# Altium PCB PCB1.PcbDoc
Units mm, origin at the board's own origin, x right, y up, seen from the top; angles counter-clockwise.
Board outline 56.13 x 52.96 mm, 2 copper layers (Top Layer, Bottom Layer); 22 components, 19 nets, 89 pads, 0 vias.
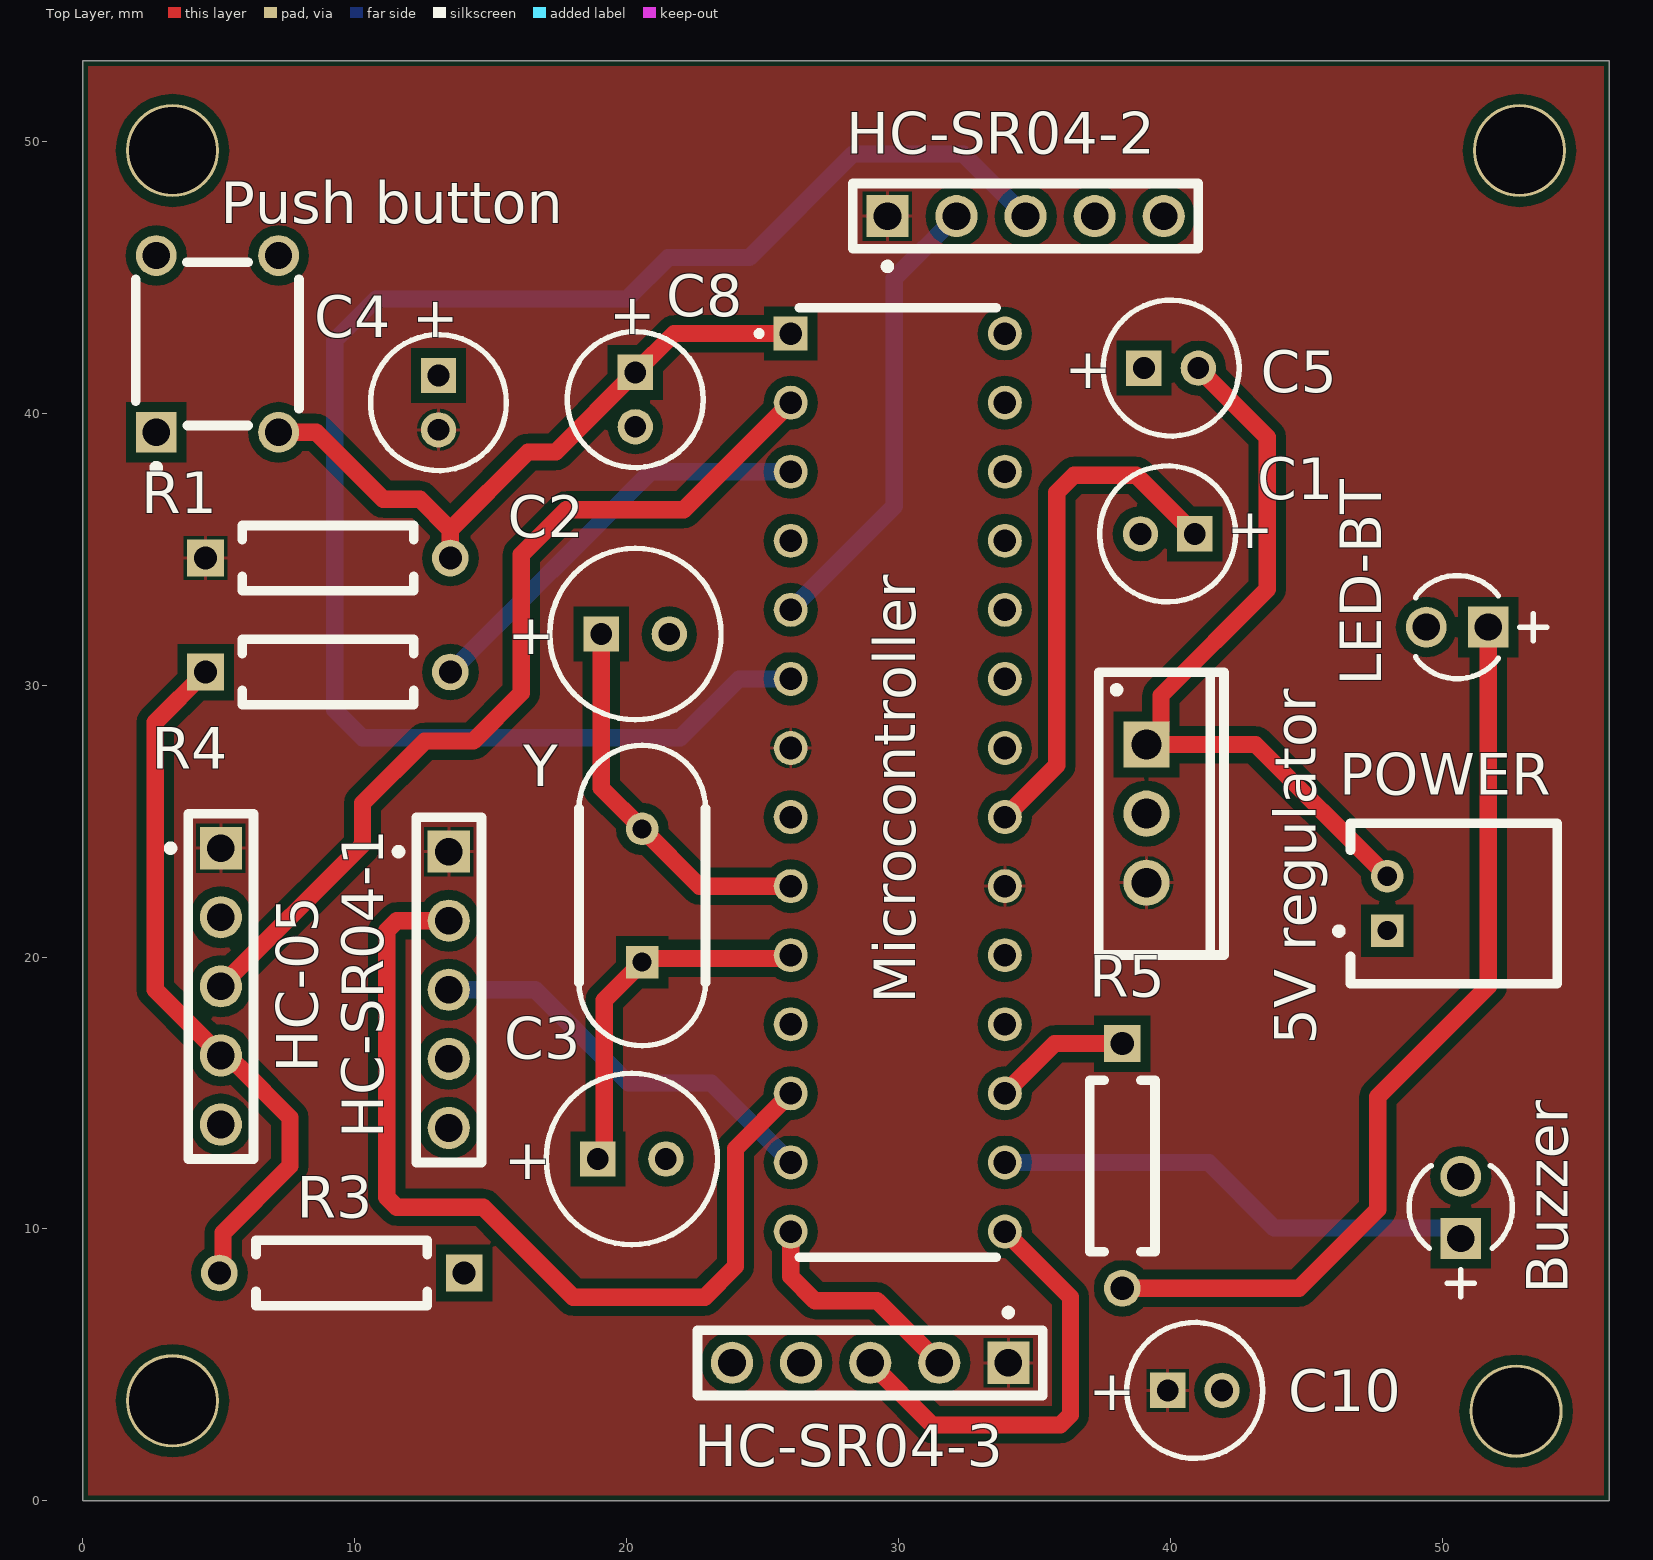
[diagram p0: Top Layer view]
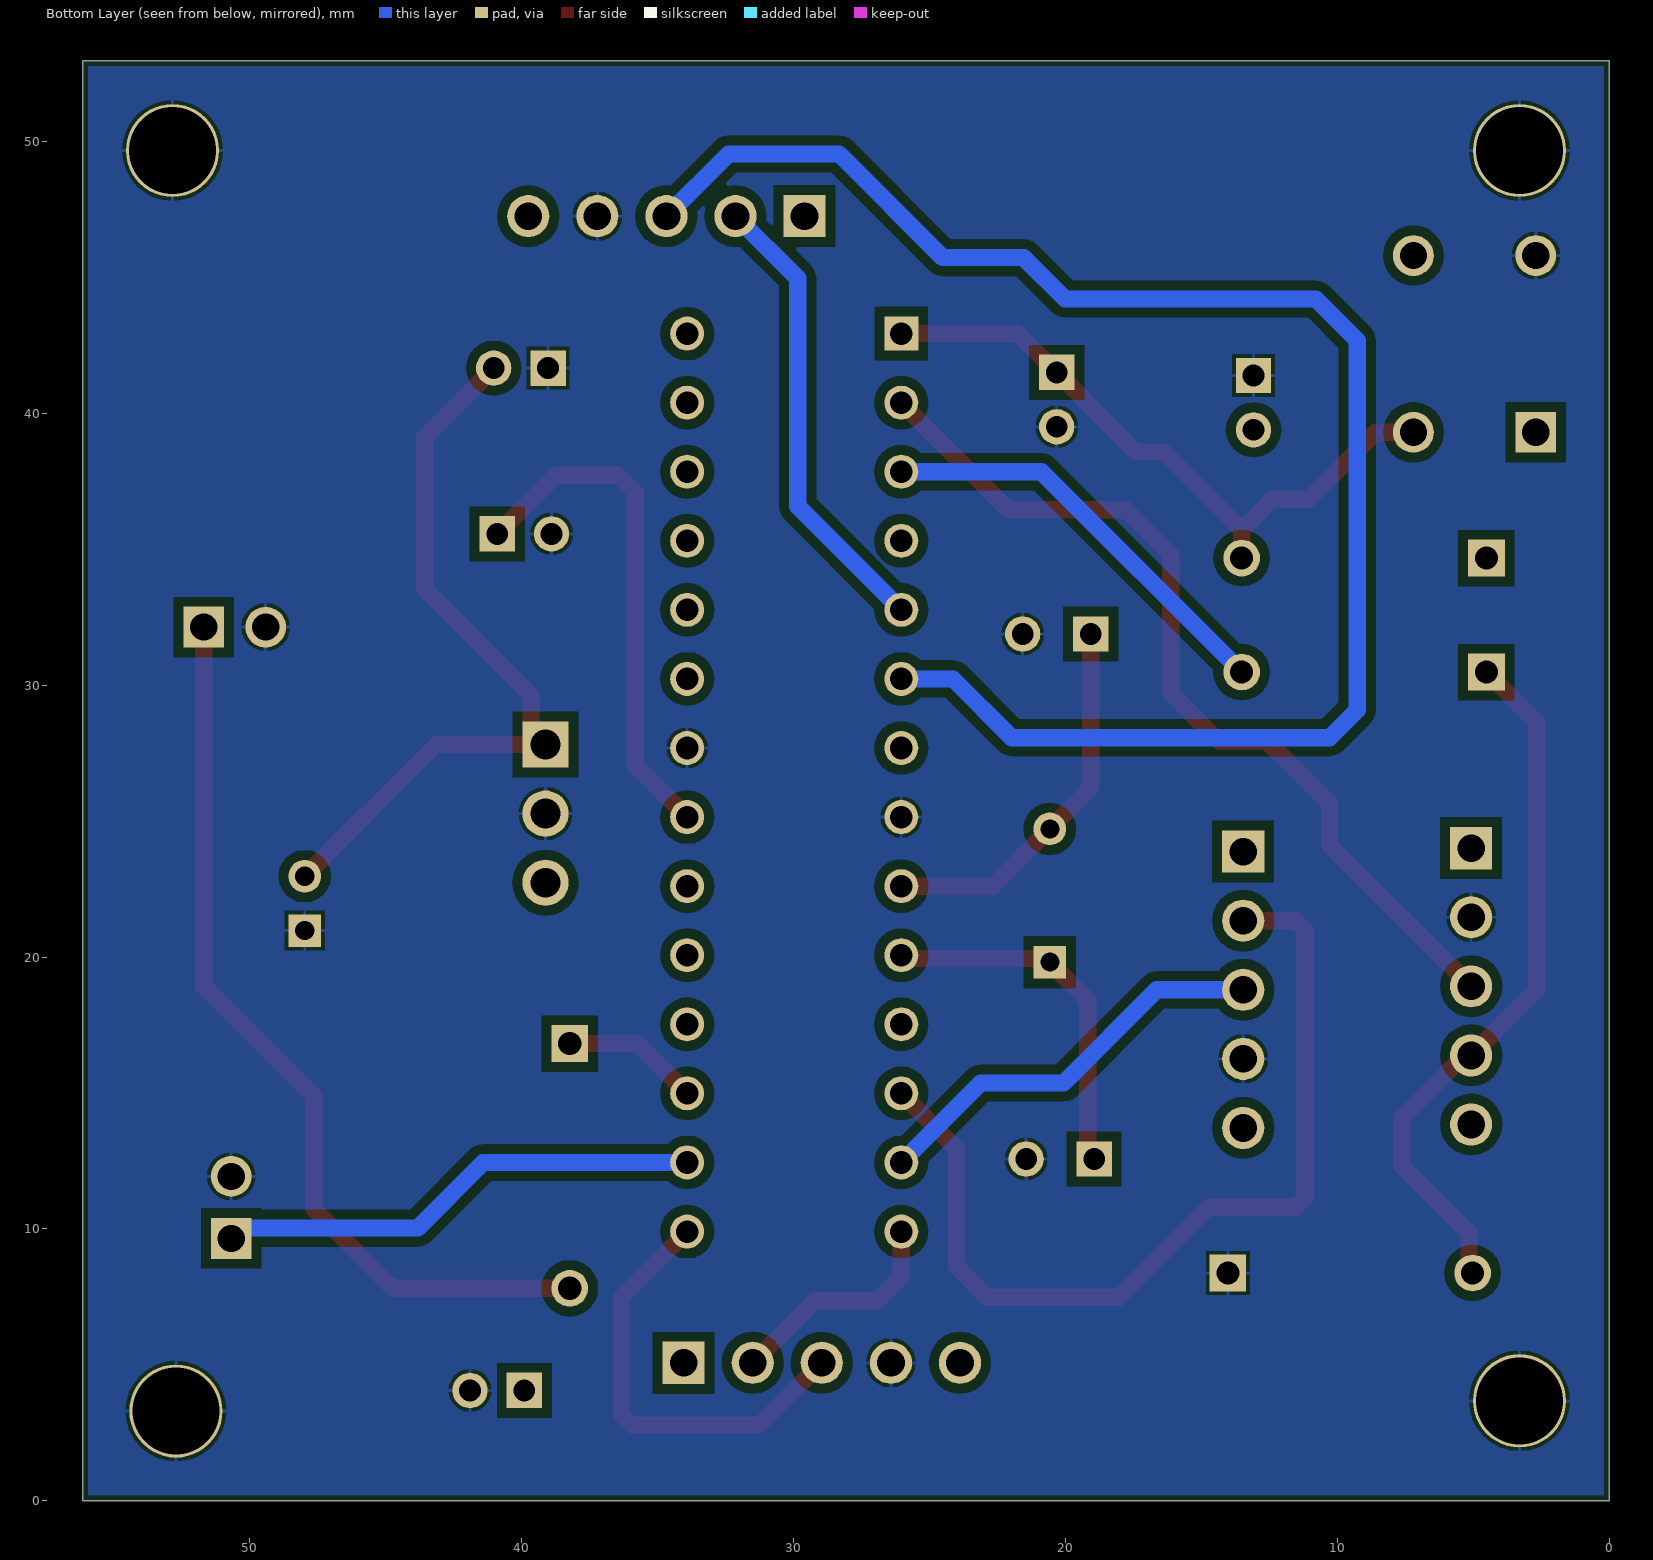
[diagram p1: Bottom Layer view, seen from below]

## Layer stack, top to bottom
Top Solder: solder mask 0.0102, Solder Resist, Dk 3.5
Top Layer: signal copper 0.0356
Dielectric 1: dielectric 0.32, FR-4, Dk 4.8
Bottom Layer: signal copper 0.0356
Bottom Solder: solder mask 0.0102, Solder Resist, Dk 3.5

## Board outline
0,0 56.134,0 56.134,52.959 0,52.959

## Design rules (kind name [scope] priority, off if disabled: settings)
BoardOutlineClearance [All] p1: gap=0.2 ignorepadtopadclearanceinfootprint=FALSE
Clearance [All] p1: gap=0.356 ignorepadtopadclearanceinfootprint=FALSE
ComponentClearance [All] p1: gap=0.127 collisioncheckmode=3 verticalgap=0.127 showdistances=TRUE
DiffPairsRouting [All] p1: maxlimit=0.254 minlimit=0.127 mostfreqgap=0.127 toplayer_minwidth=0.127 toplayer_maxwidth=25.4 toplayer_prefwidth=0.127 bottomlayer_minwidth=0.127 bottomlayer_maxwidth=25.4 bottomlayer_prefwidth=0.127 maxuncoupledlength=12.7
Height [All] p1: minheight=0 maxheight=1816.048 prefheight=12.7
HoleSize [All] p1: absolutevalues=TRUE maxlimit=6.3 minlimit=0.3 maxpercent=80.000 minpercent=20.000
HoleToHoleClearance [All] p1: gap=0.25 allowstackedmicrovias=FALSE
MinimumAnnularRing [All] p1: minimumring=0.076
MinimumSolderMaskSliver [All] p1: minsoldermaskwidth=0
PlaneClearance [All] p1: clearance=0.127
PlaneConnect PlaneConnectPowerPads [InPadClass('PowerPads')] p1: planeconnectstyle=Direct reliefexpansion=0.508 reliefentries=4 reliefconductorwidth=0.254 reliefairgap=0.254
PlaneConnect [All] p2: pad.planeconnectstyle=Relief pad.reliefexpansion=0.3 pad.reliefentries=4 pad.reliefconductorwidth=0.127 pad.reliefairgap=0.127 via.planeconnectstyle=Direct via.reliefexpansion=0.3 via.reliefentries=4 via.reliefconductorwidth=0.127 via.reliefairgap=0.127
PolygonConnect PolygonConnectPowerPads [All vs (InPadClass('PowerPads'))] p1: connectstyle=Direct reliefconductorwidth=0.254 reliefentries=4 polygonreliefangle="90 Angle" airgapwidth=0.254
PolygonConnect [All] p2: thpad.connectstyle=Relief thpad.reliefconductorwidth=0.127 thpad.reliefentries=4 thpad.polygonreliefangle="90 Angle" thpad.airgapwidth=0.127 smdpad.connectstyle=Relief smdpad.reliefconductorwidth=0.127 smdpad.reliefentries=4 smdpad.polygonreliefangle="90 Angle" smdpad.airgapwidth=0.127 via.connectstyle=Direct via.reliefconductorwidth=0.127 via.reliefentries=4 via.polygonreliefangle="90 Angle" via.airgapwidth=0.127
RoutingVias [All] p1: holewidth=0.3 width=0.6 viastyle="Through Hole" minholewidth=0.3 minwidth=0.6 maxholewidth=0.6 maxwidth=6.6
SilkToSilkClearance [All] p1: silktosilkclearance=0
SilkToSolderMaskClearance [IsPad] p1: minsilkscreentomaskgap=0.127 clearancetoexposedcopper=TRUE
SolderMaskExpansion [All] p1: expansion=0.075 istentingtop=FALSE
Width 5v [InNet('+5')] p1: maxlimit=0.635 minlimit=0.635 preferedwidth=0.635
Width 7V [InNet('Net5V regulator_1')] p2: maxlimit=0.635 minlimit=0.635 preferedwidth=0.635
Width [All] p3: maxlimit=25.4 minlimit=0.356 preferedwidth=0.635 minimp=50.000000 maximp=50.000000 favimp=50.000000
20 further rules are at their usual default settings.

## Components (designator, comment, footprint, x,y, rotation, side; value= is the part's Value field where it differs from the comment)
"5V regulator" "L7805CV" TO220 39.116,25.273 r270 top
Buzzer "304090041" LED-2P-2.28-3MM_A 50.673,10.795 r90 top
C1 "ECA1HM100" CAPPR55-200-1100X500X1200 39.894,35.56 r180 top value=10µF
C2 "ECA-2AM220" CAPPR55-250-1120X630X1220 20.32,31.877 r0 top value=22µF
C3 "ECA-2AM220" CAPPR55-250-1120X630X1220 20.193,12.573 r0 top value=22µF
C4 "ECA1HM100" CAPPR55-200-1100X500X1200 13.081,40.386 r270 top value=10µF
C5 "ECA1HM100" CAPPR55-200-1100X500X1200 40.021,41.656 r0 top value=10µF
C8 "ECA1HM100" CAPPR55-200-1100X500X1200 20.32,40.497 r270 top value=10µF
C10 "ECA1HM100" CAPPR55-200-1100X500X1200 40.894,4.064 r0 top value=10µF
HC-05 "77311-462K05LF" FCI-77311-5_V 5.08,18.923 r270 top
HC-SR04-1 "77311-462K05LF" FCI-77311-5_V 13.462,18.796 r270 top
HC-SR04-2 "77311-462K05LF" FCI-77311-5_V 34.671,47.244 r0 top
HC-SR04-3 "77311-462K05LF" FCI-77311-5_V 28.956,5.08 r180 top
LED-BT "304090041" LED-2P-2.28-3MM_A 50.546,32.131 r180 top
Microcontroller "ATMEGA328-PU" DIP787W46P254L3467H508Q28 29.972,26.416 r0 top
POWER "S2B-PH-K-S(LF)(SN)" JST-S2B-PH-K-S_V 50.419,21.971 r90 top
"Push button" "B3F-1000" OMRON-B3F-1000-4_V 4.953,42.545 r90 top
R1 "MFR-25FBF52-221R" RESA60-630X240 9.017,34.671 r0 top value=221
R3 "MFR-25FBF52-1K" RESA60-630X240 9.525,8.382 r180 top
R4 "MFR-25FBF52-1K" RESA60-630X240 9.017,30.48 r0 top value=1k
R5 "MFR-25FBF52-1K" RESA60-630X240 38.227,12.319 r270 top value=330
Y "HC-49US 16.000MHZ" JPY-HC-49US 20.574,22.262 r90 top

## Footprints (in the part's own frame and the unit in brackets; to place one, negate y for a bottom-side part, rotate by r counter-clockwise, add the part's x,y. Pads: shape width x height; smd on the part's side, far side on the other; paste and mask are expansions set on the pad)
CAPPR55-200-1100X500X1200 [mm] "THD, 2-Leads, Dia 5mm, Pin Spacing 2mm"
  rect 1.3x1.3 hole 0.8: 1(-1,0)
  round 1.3 hole 0.8: 2(1,0)
  silkscreen extent -2.5,-2.5 2.5,2.5, body extent -2.5,-2.5 2.45,2.5, height 12
CAPPR55-250-1120X630X1220 [mm] "THD, 2-Leads, Dia 6.3mm, Pin Spacing 2.5mm"
  rect 1.3x1.3 hole 0.8: 1(-1.25,0)
  round 1.3 hole 0.8: 2(1.25,0)
  silkscreen extent -3.15,-3.15 3.15,3.15, body extent -3.15,-3.15 3.16,3.15, height 12.21
DIP787W46P254L3467H508Q28 [mm]
  rect 1.25x1.25 / inner round 1.25 / far side rect 1.25x1.25 hole 0.83: 1(-3.937,16.51)
  round 1.25 hole 0.83: 2(-3.937,13.97) 3(-3.937,11.43) 4(-3.937,8.89) 5(-3.937,6.35) 6(-3.937,3.81) 7(-3.937,1.27) 8(-3.937,-1.27) 9(-3.937,-3.81) 10(-3.937,-6.35) 11(-3.937,-8.89) 12(-3.937,-11.43) 13(-3.937,-13.97) 14(-3.937,-16.51) 15(3.937,-16.51) 16(3.937,-13.97) 17(3.937,-11.43) 18(3.937,-8.89) 19(3.937,-6.35) 20(3.937,-3.81) 21(3.937,-1.27) 22(3.937,1.27) 23(3.937,3.81) 24(3.937,6.35) 25(3.937,8.89) 26(3.937,11.43) 27(3.937,13.97) 28(3.937,16.51)
  silkscreen extent -5.2,-17.45 3.62,17.45, body extent -3.95,-17.34 3.95,17.34, height 4.57
FCI-77311-5_V [mm] "THD, 5-Leads, Body 12.7x2.4mm, Pitch 2.54mm"
  rect 1.55x1.55 hole 1.02: 1(-5.08,0)
  round 1.55 hole 1.02: 2(-2.54,0) 3(0,0) 4(2.54,0) 5(5.08,0)
  silkscreen extent -6.35,-1.97 6.35,1.2, body extent -6.35,-1.2 6.35,1.2, height 16.24
JPY-HC-49US [mm] "THD, 2-Leads, Body 11.05x4.65mm, Pitch 4.9mm"
  rect 1.2x1.2 hole 0.7: 1(-2.45,0)
  round 1.2 hole 0.7: 2(2.45,0)
  silkscreen extent -5.53,-2.33 5.53,2.33, body extent -5.53,-2.33 5.52,2.32, height 3.5
JST-S2B-PH-K-S_V [mm] "THD, 2-Leads, Body 7.6x5.9mm, Pitch 2mm"
  rect 1.2x1.2 hole 0.7: 1(-1,2.45)
  round 1.2 hole 0.7: 2(1,2.45)
  silkscreen extent -2.95,-3.8 2.95,4.35, body extent -2.95,-3.8 2.95,3.8, height 4.8
LED-2P-2.28-3MM_A [mm] "LED, 2-Leads, Dia 3mm, Pitch 2.28mm"
  rect 1.5x1.5 hole 1: 1(-1.14,0)
  round 1.5 hole 1: 2(1.14,0)
  silkscreen extent -3.29,-1.9 1.52,1.9, body extent -1.9,-1.91 1.52,1.91, height 5.3
OMRON-B3F-1000-4_V [mm] "TH, 4-Leads, Body 6x6mm"
  rect 1.5x1.5 hole 1 paste+0: 1(-3.25,2.25)
  round 1.5 hole 1 paste+0: 2(3.25,2.25) 4(3.25,-2.25)
  round 1.5 hole 1 paste+0 mask+0.102: 3(-3.25,-2.25)
  silkscreen extent -4.67,-3 3,3, body extent -3.4,-3 3.4,3, height 4.5
RESA60-630X240 [mm] "Axial Resistor, 2-Leads, Dia 2.4mm, Body Length 6.3mm"
  rect 1.35x1.35 hole 0.85: 1(-4.5,0)
  round 1.35 hole 0.85: 2(4.5,0)
  silkscreen extent -3.15,-1.2 3.15,1.2, body extent -4.77,-1.19 4.77,1.2, height 2.4
TO220 [mm] "TO, Thru-Hole, Vertical, Heatsink Mounted; 3 In-Line Leads; Pitch 2.54 mm"
  rect 1.7x1.7 hole 1.1: 1(-2.54,0)
  round 1.7 hole 1.1: 2(0,0) 3(2.54,0)
  silkscreen extent -5.2,-1.75 5.2,2.85, body extent -5.25,-1.8 5.25,2.9, height 19.7

## Part data
"5V regulator": library part CMP-019-00018-3, "Positive Voltage Regulator IC, 1.5 A, 5 V, 0 to 125 degC, 3-Pin TO-220, RoHS, Tube", Case/Package=TO-220, Dropout Voltage=2V, Manufacturer=STMicroelectronics, Max Input Voltage=35V, Max Operating Temperature=125°C, Max Ouput Current=1.5A, Max Supply Voltage=20V, Min Input Voltage=7V, Min Operating Temperature=0°C, Min Supply Voltage=8V, Nominal Output Voltage=5V, Package Quantity=50, Datasheet URL=https://datasheet.ciiva.com/15111/getdatasheetpartid-44136-15111027.pdf, Datasheet Version="Rev 30, 09/2012", Manufacturer URL=http://www.st.com/, Mounting Technology=TH, Output Current=1.5A, Output Voltage=5V, Outputs=1, Packaging=Rail/Tube, Pins=3, RoHS Compliant=True
Buzzer LED-BT: library part CMP-007-00007-2, "Red LED, 80 mW, 30 mA, -25 to 85 degC, 2-Pin THD", Manufacturer="Shenzhen CGX", Package Description="2-Pin Through Hole Device, Dia 3 mm, Pitch 2.28 mm", Case/Package=304090041, Datasheet URL=http://datasheet.octopart.com/304090041-Chengguangxing-datasheet-62330656.pdf, Datasheet Version=Sep-14, Manufacturer URL=http://szcgx.com/, Mounting Technology=TH, Package Reference=304090041, RoHS Compliant=Unknown
C1 C4 C5 C8 C10: library part CMP-001-00025-7, "Aluminum Electrolytic Capacitor, 10 uF, +/- 20%, 50 V, -40 to 85 degC, 2-Pin THD, RoHS, Bulk", Capacitor Type=Electrolytic, Case/Package=Radial, Manufacturer=Panasonic, Max Operating Temperature=85°C, Min Operating Temperature=-40°C, Package Description="2-Pin Radial Lead, Dia 5 mm, Height 12 mm", Package Quantity=200, Package Reference=CAPPR55-200-1100X500X1200, Ripple Current=65mA, Tolerance=20%, Voltage Rating=50V, Datasheet URL=https://industrial.panasonic.com/cdbs/www-data/pdf/RDF0000/ABA0000C1218.pdf, Datasheet Version="Rev. 05, 10/2016", Diameter=5mm, Lead Pitch=2mm, Manufacturer URL=http://www.panasonic.com/, Mounting Technology=TH, Packaging=Bulk, Pins=2, Ripple Current (AC)=65mA, RoHS Compliant=True
C2 C3: library part CMP-001-00035-7, "Aluminum Electrolytic Capacitor, 22 uF, +/- 20%, 100 V, -40 to 85 degC, 2-Pin THD, RoHS, Bulk", Capacitor Type=Electrolytic, Case/Package=Radial, Manufacturer=Panasonic, Max Operating Temperature=85°C, Min Operating Temperature=-40°C, Package Description="2-Pin Radial Lead, Dia 6.3 mm, Height 12.2 mm", Package Quantity=200, Package Reference=CAPPR55-250-1120X630X1220, Ripple Current=115mA, Tolerance=20%, Voltage Rating=100V, Datasheet URL=https://industrial.panasonic.com/cdbs/www-data/pdf/RDF0000/ABA0000C1047.pdf, Datasheet Version=Mar-16, Diameter=6.3mm, Lead Pitch=2.5mm, Manufacturer URL=http://www.panasonic.com/, Mounting Technology=TH, Packaging=Bulk, Pins=2, Ripple Current (AC)=115mA, RoHS Compliant=True
HC-05 HC-SR04-1 HC-SR04-2 HC-SR04-3: library part CMP-002-00021-2, "Male Header, Pitch 2.54 mm, 1 x 5 Position, Height 16.24 mm, Tail Length 3.05 mm, -65 to 125 degC, RoHS, Tape and Reel", Case/Package=77311-5, Manufacturer="FCI Electronics", Package Description="Male Header, Pitch 2.54 mm, 1 x 5 Position, Height 16.24 mm, Tail Length 3.05 mm", Connector Type=Header, Datasheet URL=http://portal.fciconnect.com/Comergent//fci/drawing/77311.pdf, Datasheet Version="Rev. CK, 07/2016", Gender=Male, Manufacturer URL=http://portal.fciconnect.com/, Mounting Technology=TH, Package Reference=77311-5, RoHS Compliant=Unknown
Microcontroller: "AVR AVRÂ® ATmega Microcontroller IC 8-Bit 20MHz 32KB (16K x 16) FLASH 28-PDIP", Package="DIP-28 Microchip Technology", Availability="In Stock", Check_prices=https://www.snapeda.com/parts/ATMEGA328-PU/Microchip/view-part/?ref=eda, MF=Microchip, MP=ATMEGA328-PU, Price=None, Purchase-URL=https://pricing.snapeda.com/search/part/ATMEGA328-PU/?ref=eda, SnapEDA_Link=https://www.snapeda.com/parts/ATMEGA328-PU/Microchip/view-part/?ref=snap
POWER: library part CMP-002-00030-2, "Male Header, Pitch 2 mm, 1 x 2 Position, Height 4.8 mm, Tail Length 3.4 mm, -25 to 85 degC, RoHS, Bulk", Case/Package=S2B-PH-K-S, Manufacturer="Japan Solderless Terminals", Max Operating Temperature=85°C, Min Operating Temperature=-25°C, Package Description="Male Header, Pitch 2 mm, 1 x 2 Position, Height 4.8 mm, Tail Length 3.4 mm", Connector Type=Header, Datasheet URL=http://www.jst-mfg.com/product/pdf/eng/ePH.pdf, Datasheet Version=Dec-12, Gender=Male, Mounting Technology=SM, Package Reference=S2B-PH-K-S, RoHS Compliant=Unknown
"Push button": library part CMP-011-00004-2, "Tactile Switch, SPST-NO, 0.05 A, 24 V, -25 to 70 degC, 4-Pin THD, RoHS, Bulk", Contact Current Rating=50mA, Manufacturer="Omron Electronic Components", Max Contact Resistance=100mohm, Max Operating Temperature=70°C, Max Voltage Rating (DC)=24V, Min Operating Temperature=-25°C, Operating Force=100gf, Package Description="4-Pin Through Hole Device, Body 6 x 6 mm", Package Quantity=1500, Resistance=0.1Ohm, Case/Package=B3F-1000, Contact Material=Gold, Contact Plating=Gold, Current Rating=50mA, Datasheet URL=http://www.omron.com/ecb/products/pdf/en-b3f.pdf, Datasheet Version=Jan-15, Manufacturer URL=http://www.omron.com/, Max Current Rating=50mA, Mounting Technology=TH, Package Reference=B3F-1000, Packaging=Bulk, Pins=4, RoHS Compliant=True, Throw Configuration=SPST, Voltage Rating=24V, Voltage Rating (DC)=24V
R1: library part CMP-009-00051-4, "Axial Resistor, 221 Ohm, +/- 1%, 250 mW, -55 to 155 degC, 2-Pin THD, RoHS, Bulk", Case/Package=Axial, Manufacturer=Yageo, Max Operating Temperature=155°C, Min Operating Temperature=-55°C, Package Description="2-Pin Axial Lead, Dia 2.4 mm, Body Length 6.3 mm", Package Quantity=200, Package Reference=MFR-25, Power=250mW, Tolerance=1%, Voltage Rating=250V, Datasheet URL=http://www.yageo.com/documents/recent/Yageo%20LR_MFR_2013.pdf, Datasheet Version=Apr-13, Manufacturer URL=http://www.yageo.com/, Mounting Technology=TH, Packaging=Bulk, RoHS Compliant=True
R3 R4 R5: library part CMP-009-00048-4, "Axial Resistor, 1 KOhm, +/- 1%, 250 mW, -55 to 155 degC, 2-Pin THD, RoHS, Bulk", Case/Package=Axial, Manufacturer=Yageo, Max Operating Temperature=155°C, Min Operating Temperature=-55°C, Package Description="2-Pin Axial Lead, Dia 2.4 mm, Body Length 6.3 mm", Package Quantity=200, Package Reference=MFR-25, Power=250mW, Tolerance=1%, Voltage Rating=250V, Composition=CarbonFilm, Datasheet URL=http://www.yageo.com/documents/recent/Yageo%20LR_MFR_2013.pdf, Datasheet Version=Apr-13, Manufacturer URL=http://www.yageo.com/, Mounting Technology=TH, Packaging=Bulk, RoHS Compliant=True
  R3: R3=2k
Y: library part CMP-003-00005-2, "Crystal, 16 MHz, +/- 30 ppm, 18 pF, -20 to 70 degC, 2-Pin THD", Case/Package=HC-49US, Frequency=16MHz, Manufacturer="Jing peng yuan", Package Description="2-Pin Throug Hole Device, Body 11.05 x 4.65 mm, Pitch 4.9 mm", Datasheet URL=https://statics3.seeedstudio.com/images/opl/datasheet/306010014.pdf, Datasheet Version=May-15, Mounting Technology=TH, Package Reference=HC-49US, RoHS Compliant=Unknown

## Free pads (board coordinates)
  round 3.429 hole 3.2: 7(3.302,49.657) 8(52.832,49.657) 9(3.302,3.683) 11(52.705,3.302)

## Nets (pads, with @x,y where several pads share a name; then routed paths per layer and width w, separated by ;. In a path a pad name is that pad's centre, name@x,y a point inside that pad or via, vN(x,y) a via of type N, cw(c..) or ccw(c..) an arc to the next point about the centre after c; other vN are vias at no path point)
+5: "5V regulator.3" C4.2 C10.1 HC-05.1 HC-SR04-1.1 HC-SR04-2.1 HC-SR04-3.1 Microcontroller.7 Microcontroller.20 R1.1
GND: "5V regulator.2" "Push button.2" Buzzer.2 C1.2 C2.2 C3.2 C4.1 C5.1 C8.2 C10.2 HC-05.2 HC-SR04-1.4 HC-SR04-2.4 HC-SR04-3.4 LED-BT.2 Microcontroller.8 Microcontroller.22 pad.7 pad.8 pad.9 pad.11 POWER.1 R3.1
"Net5V regulator_1": "5V regulator.1" C5.2 POWER.2 | length 27.6
  Top Layer w0.635: C5.2 43.561,39.116 43.561,33.528 39.649,29.616 39.649,28.346 39.116,27.813 43.127,27.813 POWER.2
NetC1_1: C1.1 Microcontroller.21 | length 19
  Top Layer w0.635: Microcontroller.21 35.814,27.051 35.814,37.084 36.449,37.719 38.735,37.719 C1.1
NetC2_1: C2.1 Microcontroller.9 Y.2 | length 14.1
  Top Layer w0.635: C2.1 19.07,26.216 Y.2 22.68,22.606 Microcontroller.9
NetC3_1: C3.1 Microcontroller.10 Y.1 | length 13.5
  Top Layer w0.635: C3.1 19.177,12.807 19.177,18.415 Y.1 20.71,19.948 25.917,19.948 Microcontroller.10
NetHC-05_3: HC-05.3 Microcontroller.2 | length 33.7
  Top Layer w0.635: HC-05.3 10.287,24.13 10.287,25.654 12.573,27.94 14.36,27.94 16.129,29.709 16.129,34.798 17.78,36.449 22.098,36.449 Microcontroller.2
NetHC-05_4: HC-05.4 R3.2 R4.1 | length 26.1
  Top Layer w0.635: R4.1 2.667,28.63 2.667,18.796 HC-05.4 5.328,16.383 5.785,15.926 5.791,15.926 7.62,14.097 7.62,12.319 5.162,9.861 5.162,8.519 R3.2
NetLED-BT_1: LED-BT.1 R5.2 | length 33.7
  Top Layer w0.635: R5.2 44.727,7.819 47.625,10.717 47.625,14.859 51.686,18.92 LED-BT.1
NetMicrocontroller_3: Microcontroller.3 R4.2 | length 15.6
  Bottom Layer w0.635: R4.2 20.883,37.846 Microcontroller.3
NetMicrocontroller_17: Microcontroller.17 R5.1 | length 5.1
  Top Layer w0.635: Microcontroller.17 35.742,16.819 R5.1
PB0: HC-SR04-3.2 Microcontroller.14 | length 8.4
  Top Layer w0.635: Microcontroller.14 26.035,8.255 26.924,7.366 29.21,7.366 HC-SR04-3.2
PB1: HC-SR04-3.3 Microcontroller.15 | length 16.2
  Top Layer w0.635: HC-SR04-3.3 31.242,2.794 35.95,2.794 36.322,3.166 36.322,7.493 Microcontroller.15
PB2: Buzzer.1 Microcontroller.16 | length 17.9
  Bottom Layer w0.635: Microcontroller.16 41.402,12.446 43.815,10.033 50.295,10.033 Buzzer.1
PD3: HC-SR04-2.2 Microcontroller.5 | length 17
  Bottom Layer w0.635: Microcontroller.5 29.845,36.576 29.845,44.958 HC-SR04-2.2
PD4: HC-SR04-2.3 Microcontroller.6 | length 60.9
  Bottom Layer w0.635: Microcontroller.6 24.13,30.226 21.971,28.067 10.287,28.067 9.271,29.083 9.271,42.672 10.795,44.196 20.003,44.196 21.527,45.72 24.511,45.72 28.321,49.53 32.385,49.53 HC-SR04-2.3
PD6: HC-SR04-1.2 Microcontroller.12 | length 34.3
  Top Layer w0.635: HC-SR04-1.2 11.548,21.336 11.176,20.964 11.176,11.167 11.548,10.795 14.732,10.795 18.034,7.493 22.869,7.493 24.003,8.627 24.003,12.954 Microcontroller.12
PD7: HC-SR04-1.3 Microcontroller.13 | length 15.2
  Bottom Layer w0.635: HC-SR04-1.3 16.637,18.796 20.066,15.367 23.114,15.367 Microcontroller.13
RESET: "Push button.3" C8.1 Microcontroller.1 R1.2 | length 24.3
  Top Layer w0.635: 7.203,39.295 8.584,39.295 11.049,36.83 12.4,36.83 13.517,35.713 ; R1.2 13.517,35.713 ; Microcontroller.1 21.749,42.926 C8.1 17.395,38.572 16.376,38.572 13.517,35.713
pads on no net: "Push button.1" "Push button.4" HC-05.5 HC-SR04-1.5 HC-SR04-2.5 HC-SR04-3.5 Microcontroller.4 Microcontroller.11 Microcontroller.18 Microcontroller.19 Microcontroller.23 Microcontroller.24 Microcontroller.25 Microcontroller.26 Microcontroller.27 Microcontroller.28

## Polygon pours and split planes (outlines as drawn)
GND on Bottom Layer "GND_L02_P001" (solid, pour order 1): 0.127,-0.064 56.261,-0.064 56.261,52.895 0.127,52.895
+5 on Top Layer "+5_L01_P000" (solid, pour order 0): 0.127,-0.127 56.261,-0.127 56.261,52.832 0.127,52.832

## Silkscreen, mask and mechanical layers (free items; w line width, h text height)
Mechanical 13:
  lines w0.254: -0.127,53.213 -0.127,53.086 56.134,53.086 56.134,-0.127 0,-0.127 0,53.086

## Text inside footprints (layer, text, board x,y; h text height)
C1: Top Overlay "+" at 43.802,36.297 h1.5 r180
C2: Top Overlay "+" at 15.62,31.127 h1.5
C3: Top Overlay "+" at 15.493,11.823 h1.5
C4: Top Overlay "+" at 12.344,44.294 h1.5 r270
C5: Top Overlay "+" at 36.113,40.919 h1.5
C8: Top Overlay "+" at 19.583,44.405 h1.5 r270
C10: Top Overlay "+" at 36.986,3.327 h1.5